# Altium PCB Vertap_PCB.PcbDoc
Units mm, origin at the board's own origin, x right, y up, seen from the top; angles counter-clockwise.
Board outline 64 x 27.5 mm, 2 copper layers (Top Layer, Bottom Layer), stack 1.671 mm thick; 38 components, 23 nets, 191 pads, 156 vias.
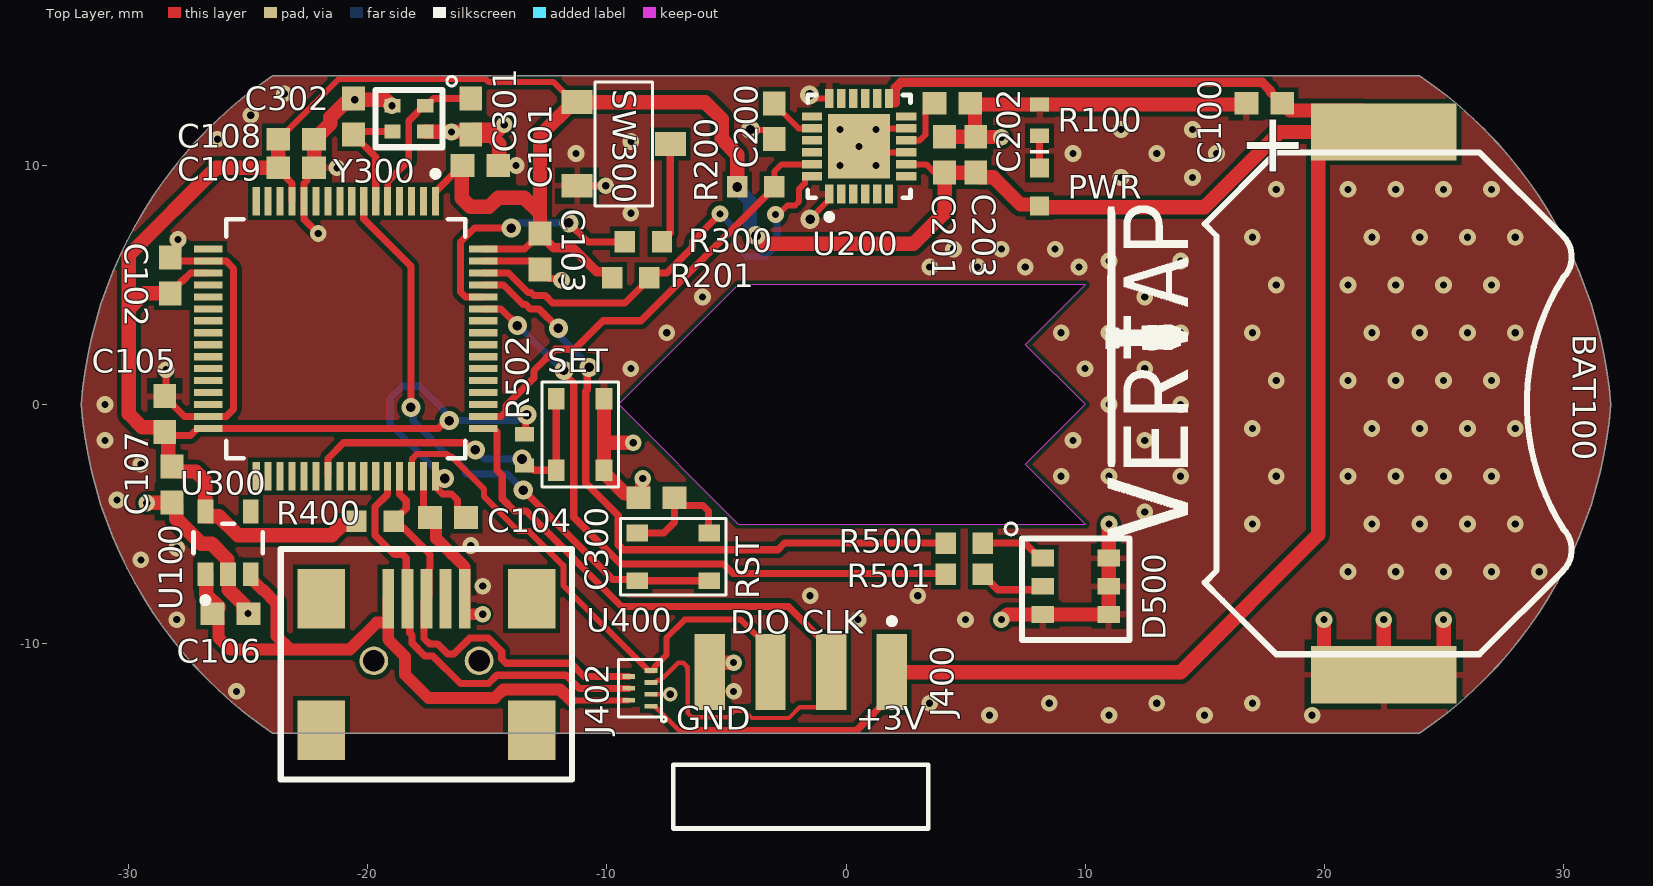
[diagram p0: Top Layer view]
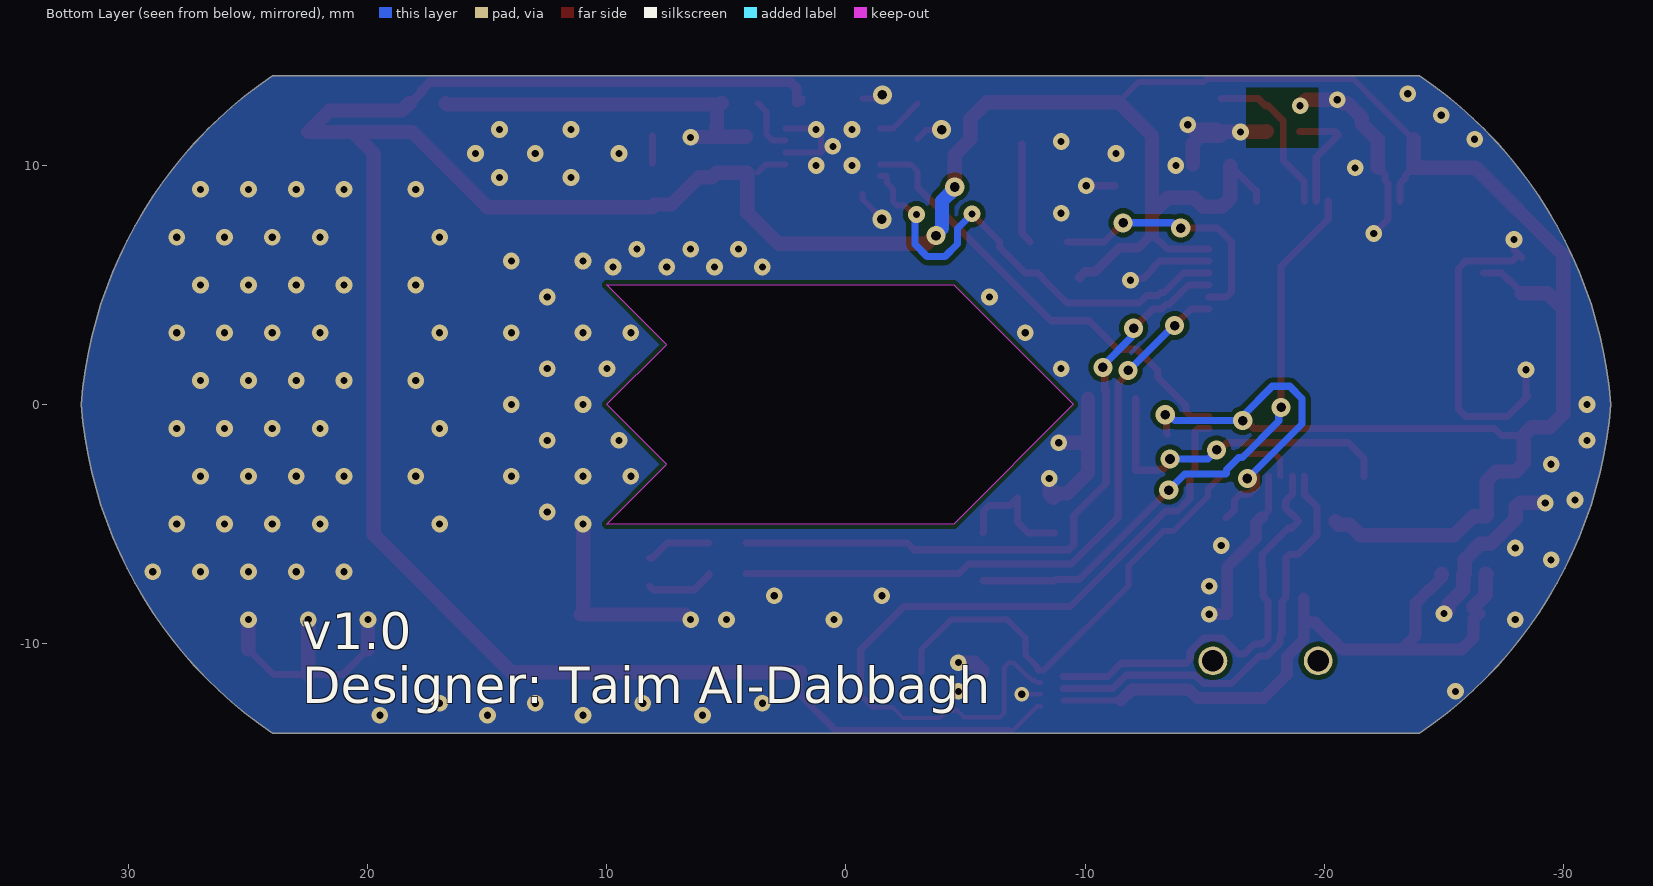
[diagram p1: Bottom Layer view, seen from below]
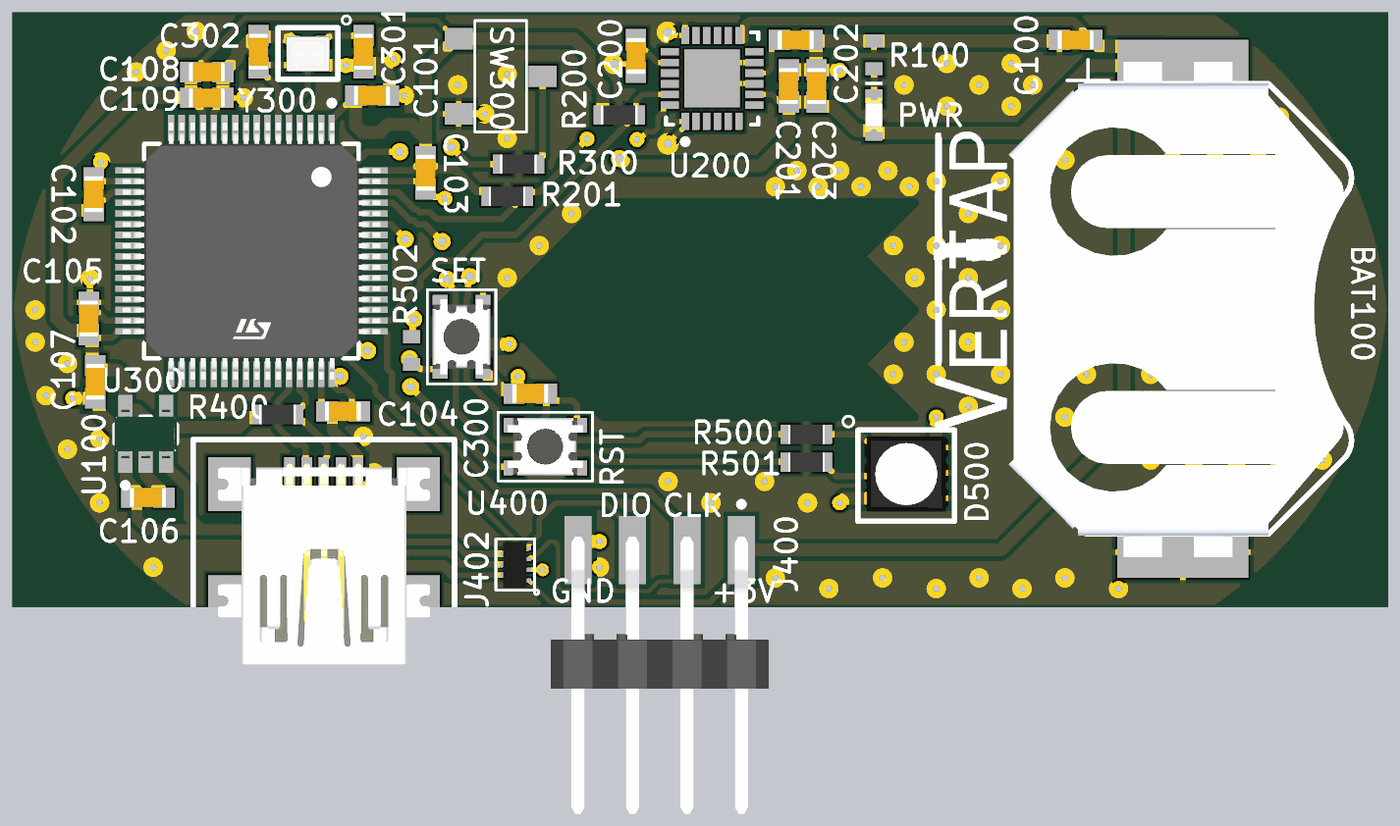
[diagram p2: 3D render of the assembled board from above, using the file's embedded part models]

## Layer stack, top to bottom
Top Solder: solder mask 0.0102, Solder Resist, Dk 3.5
Top Layer: signal copper 0.0356
Dielectric 1: dielectric 1.6, FR-4, Dk 4.6
Bottom Layer: signal copper 0.0356
Bottom Solder: solder mask 0.0102, Solder Resist, Dk 3.5

## Board outline
-24,-13.75 cw(c-13.714,1.437) -32,0 cw(c-13.714,-1.437) -24,13.75 24,13.75 cw(c13.714,-1.437) 32,0 cw(c13.714,1.437) 24,-13.75
cut-out: -4.5,5 -9.5,0 -4.5,-5 10,-5 7.5,-2.5 10,0 7.5,2.5 10,5

## Design rules (kind name [scope] priority, off if disabled: settings)
Clearance [All] p1: gap=0.2 ignorepadtopadclearanceinfootprint=FALSE except(0.127: SMDPad-SMDPad; 0.26: Via-Via; 0.33: Arc-Via Track-Via SMDPad-Via THPad-Via; 0.4: SMDPad-THPad; 0.5: THPad-THPad)
DiffPairsRouting [All] p1: maxlimit=0.254 minlimit=0.2 mostfreqgap=0.2 toplayer_minwidth=0.3 toplayer_maxwidth=0.3 toplayer_prefwidth=0.3 bottomlayer_minwidth=0.3 bottomlayer_maxwidth=0.3 bottomlayer_prefwidth=0.3 maxuncoupledlength=12.7
HoleSize [All] p1: absolutevalues=TRUE maxlimit=6.3 minlimit=0.2 maxpercent=80.000 minpercent=20.000
PolygonConnect [All] p1: thpad.connectstyle=Relief thpad.reliefconductorwidth=0.254 thpad.reliefentries=4 thpad.polygonreliefangle="90 Angle" thpad.airgapwidth=0.254 smdpad.connectstyle=Relief smdpad.reliefconductorwidth=0.254 smdpad.reliefentries=4 smdpad.polygonreliefangle="90 Angle" smdpad.airgapwidth=0.254 via.connectstyle=Direct via.reliefconductorwidth=0.254 via.reliefentries=4 via.polygonreliefangle="90 Angle" via.airgapwidth=0.254
RoutingVias [All] p1: holewidth=0.4 width=0.8 viastyle="Through Hole" minholewidth=0.3 minwidth=0.6 maxholewidth=0.4 maxwidth=0.8
SolderMaskExpansion [All] p1: expansion=0.102 istentingtop=FALSE
UnRoutedNet [All] p1: checkbadconnections=TRUE
Width [All] p1: maxlimit=1 minlimit=0.15 preferedwidth=0.3
27 further rules are at their usual default settings.

## Classes and differential pairs
differential pair class USB: MCU_USB
differential pair MCU_USB: +MCU_USB_P -MCU_USB_N

## Components (designator, comment, footprint, x,y, rotation, side; value= is the part's Value field where it differs from the comment)
BAT100 "+3V" BH-67D-5 22.5,0.05 r90 top
C100 "10u" CAP_0603_MURATA 17.5,12.6 r180 top
C101 "4u7" CAP_0603_MURATA -15.3,10 r0 top
C102 "100n" CAP_0603_MURATA -28.275,5.4 r90 top
C103 "100n" CAP_0603_MURATA -12.8,6.4 r270 top
C104 "100n" CAP_0603_MURATA -16.65,-4.725 r180 top
C105 "100n" CAP_0603_MURATA -28.5,-0.4 r90 top
C106 "1u" CAP_0603_MURATA -25.75,-8.75 r0 top
C107 "1u" CAP_0603_MURATA -28.2,-3.35 r270 top
C108 "1u" CAP_0603_MURATA -23,11.1 r0 top
C109 "10n" CAP_0603_MURATA -23,9.9 r0 top
C200 "2n2" CAP_0603_MURATA -3,11.85 r270 top
C201 "10n" CAP_0603_MURATA 4.125,10.45 r90 top
C202 "100n" CAP_0603_MURATA 4.45,12.6 r0 top
C203 "100n" CAP_0603_MURATA 5.425,10.45 r90 top
C300 "100n" CAP_0603_MURATA -7.925,-3.9 r180 top
C301 "16p" CAP_0603_MURATA -15.7,12.05 r270 top
C302 "16p" CAP_0603_MURATA -20.6,12.05 r90 top
D500 "RGB LED" ASMB-TTF0-0A20B 9.605,-7.605 r0 top
J400 "GEC04SBSN-M89" FP-GEC04SBSN-M89-MFG -1.89,-16.405 r180 top
J402 "USB_B_MICRO" MUSB-B5-S-RA-SMT-PP-T/R -17.55,-11.125 r0 top
PWR "150060VS75000" WL-SMCW_0603_150060xx75000 8.1,9.1 r270 top (schematic designator D100)
R100 "1k" RESC1608X55X25LL10T15 8.1,11.9 r270 top
R200 "2k2" RES_0603_YAGEO -3.775,9.1 r0 top
R201 "2k2" RES_0603_YAGEO -9,5.3 r0 top
R300 "10k" RES_0603_YAGEO -8.475,6.8 r180 top
R400 "1k5" RES_0603_YAGEO -19.7,-4.875 r0 top
R500 "1k" RES_0603_YAGEO 4.95,-5.8 r0 top
R501 "1k" RES_0603_YAGEO 4.95,-7.1 r0 top
R502 "1k" RESC1608X55X25LL10T15 -13.45,-1.9 r90 top
RST "LS38G2F-T" LS38G2F-T -7.225,-6.375 r180 top (schematic designator SW301)
SET "LS38G2F-T" LS38G2F-T -11.125,-1.25 r270 top (schematic designator SW500)
SW300 "CJS-1200TB1" CJS-1200TB1 -9.3,10.9 r270 top
U100 "MIC5365-3.0YD5-TR" FP-TSOT-5LD-PL-1-MFG -25.85,-5.785 r90 top
U200 "MPU-6050" IS-QFN-24_V 0.55,10.8 r90 top
U300 "STM32F303RET6" FP-LQFP64-5W-MFG -20.925,2.75 r270 top
U400 "PUSB3FR6Z" PUSB3FR6Z -8.625,-11.875 r180 top
Y300 "32MHz Crystal" CX2016SA32000H0FLJG1 -18.287,11.963 r180 top

## Footprints (in the part's own frame and the unit in brackets; to place one, negate y for a bottom-side part, rotate by r counter-clockwise, add the part's x,y. Pads: shape width x height; smd on the part's side, far side on the other; paste and mask are expansions set on the pad)
ASMB-TTF0-0A20B [mm]
  rect 0.94x0.7 smd: 1(-1.38,1.18) 2(1.38,1.18) 3(-1.38,0) 4(1.38,0) 5(-1.38,-1.18) 6(1.38,-1.18)
  silkscreen extent -2.95,-2.25 2.25,2.65, body extent -1.85,-1.81 1.85,1.7, height 2.8
BH-67D-5 [mm]
  rect 2.4x6.1 smd: 1(-11.35,0) 2(11.35,0)
  silkscreen extent -10.5,-7.86 10.5,7.5, body extent -11.58,-7.49 11.53,8.13, height 3.05
CAP_0603_MURATA [mm] "Chip Capacitor, 2-Leads, Body 1.60x0.80mm, IPC Medium Density"
  rect 1x0.95 smd: 1(-0.75,0) 2(0.75,0)
  body extent -0.85,-0.45 0.85,0.45, height 0.9
CJS-1200TB1 [mm]
  rect 1x1.3 smd: 1(-1.75,-1.95) 2(0,1.95) 3(1.75,-1.95)
  silkscreen extent -2.6,-1.2 2.6,1.2, body extent -2.69,-2.31 2.71,1.89, height 2.51
CX2016SA32000H0FLJG1 [mm]
  rect 0.675x0.575 smd: 1(-0.687,-0.537) 2(0.687,-0.537) 3(0.687,0.537) 4(-0.687,0.537)
  silkscreen extent -1.99,-1.76 1.4,1.2, body extent -1.02,-0.81 1.02,0.84, height 0.45
FP-GEC04SBSN-M89-MFG [mm]
  rect 1.27x3.18 smd paste+0 mask+0: 1(-3.81,-5.205) 2(-1.27,-5.205) 3(1.27,-5.205) 4(3.81,-5.205)
  silkscreen extent -5.34,-7.46 5.34,1.34, body extent -5.44,-6.9 5.44,7.47, height 0.25
FP-LQFP64-5W-MFG [mm]
  rect 1.2x0.3 smd paste+0 mask+0: 1(-5.75,3.75) 2(-5.75,3.25) 3(-5.75,2.75) 4(-5.75,2.25) 5(-5.75,1.75) 6(-5.75,1.25) 7(-5.75,0.75) 8(-5.75,0.25) 9(-5.75,-0.25) 10(-5.75,-0.75) 11(-5.75,-1.25) 12(-5.75,-1.75) 13(-5.75,-2.25) 14(-5.75,-2.75) 15(-5.75,-3.25) 16(-5.75,-3.75) 33(5.75,-3.75) 34(5.75,-3.25) 35(5.75,-2.75) 36(5.75,-2.25) 37(5.75,-1.75) 38(5.75,-1.25) 39(5.75,-0.75) 40(5.75,-0.25) 41(5.75,0.25) 42(5.75,0.75) 43(5.75,1.25) 44(5.75,1.75) 45(5.75,2.25) 46(5.75,2.75) 47(5.75,3.25) 48(5.75,3.75)
  rect 0.3x1.2 smd paste+0 mask+0: 17(-3.75,-5.75) 18(-3.25,-5.75) 19(-2.75,-5.75) 20(-2.25,-5.75) 21(-1.75,-5.75) 22(-1.25,-5.75) 23(-0.75,-5.75) 24(-0.25,-5.75) 25(0.25,-5.75) 26(0.75,-5.75) 27(1.25,-5.75) 28(1.75,-5.75) 29(2.25,-5.75) 30(2.75,-5.75) 31(3.25,-5.75) 32(3.75,-5.75) 49(3.75,5.75) 50(3.25,5.75) 51(2.75,5.75) 52(2.25,5.75) 53(1.75,5.75) 54(1.25,5.75) 55(0.75,5.75) 56(0.25,5.75) 57(-0.25,5.75) 58(-0.75,5.75) 59(-1.25,5.75) 60(-1.75,5.75) 61(-2.25,5.75) 62(-2.75,5.75) 63(-3.25,5.75) 64(-3.75,5.75)
  silkscreen extent -7.02,-5 5,5, body extent -6.45,-6.45 6.45,6.45, height 0.25
FP-TSOT-5LD-PL-1-MFG [mm]
  rect 1x0.66 smd paste+0 mask+0: 1(-1.315,0.95) 2(-1.315,0) 3(-1.315,-0.95) 4(1.315,-0.95) 5(1.315,0.95)
  silkscreen extent -2.52,-1.45 0.8,1.45, body extent -1.91,-1.55 1.91,1.55, height 0.25
IS-QFN-24_V [mm] "QFN, 24-Leads, Body 4x4mm, Pitch 0.5mm, Thermal Pad 2.7x2.6mm"
  rect 0.8x0.35 smd: 1(-2,1.25) 2(-2,0.75) 3(-2,0.25) 4(-2,-0.25) 5(-2,-0.75) 6(-2,-1.25) 13(2,-1.25) 14(2,-0.75) 15(2,-0.25) 16(2,0.25) 17(2,0.75) 18(2,1.25)
  rect 0.35x0.85 smd mask+0.102: 7(-1.25,-1.975) 8(-0.75,-1.975) 9(-0.25,-1.975) 10(0.25,-1.975) 11(0.75,-1.975) 12(1.25,-1.975) 19(1.25,1.975) 20(0.75,1.975) 21(0.25,1.975) 22(-0.25,1.975) 23(-0.75,1.975) 24(-1.25,1.975)
  rect 2.7x2.6 smd: 25(0,0)
  silkscreen extent -3.07,-2.15 2.15,2.15, body extent -2,-2 2,2, height 0.95
LS38G2F-T [mm]
  rect 0.9x0.7 smd: 1(-1.5,-1) 1(1.5,-1) 2(-1.5,1) 2(1.5,1)
  silkscreen extent -2.2,-1.6 2.2,1.6, body extent -1.75,-1.35 1.75,1.35, height 1.6
MUSB-B5-S-RA-SMT-PP-T/R [mm]
  rect 0.5x2.5 smd: 1(-1.6,3) 2(-0.8,3) 3(0,3) 4(0.8,3) 5(1.6,3)
  rect 2x2.5 smd: 4(-4.4,-2.5) 4(-4.4,3) 4(4.4,-2.5) 4(4.4,3)
  round 1.2 hole 0.9: 4(-2.2,0.4) 4(2.2,0.4)
  silkscreen extent -6.1,-4.57 6.1,5.08, body extent -4.94,-5.43 4.96,3.97, height 4.06
PUSB3FR6Z [mm]
  rect 0.53x0.2 smd: 1(-0.467,0.75) 2(-0.467,0.25) 3(-0.467,-0.25) 4(-0.467,-0.75) 5(0.467,-0.5) 6(0.467,0) 7(0.467,0.5)
  silkscreen extent -1.1,-1.2 0.9,1.4, body extent -0.53,-1.05 0.57,1.07, height 0.48
RES_0603_YAGEO [mm] "Chip Resistor, 2-Leads, Body 1.60x0.80mm, IPC Medium Density"
  rect 0.85x0.9 smd: 1(-0.775,0) 2(0.775,0)
  body extent -0.85,-0.45 0.85,0.45, height 0.55
RESC1608X55X25LL10T15 [mm] "Chip Resistor, 2-Leads, Body 1.60x0.80mm, IPC High Density"
  rect 0.6x0.8 smd: 1(-0.65,0) 2(0.65,0)
  body extent -0.85,-0.45 0.85,0.45, height 0.55
WL-SMCW_0603_150060xx75000 [mm] "SMD Mono-color Chip LED, body 1.6x0.8mm"
  rect 0.8x0.8 smd: 1(-0.8,0) 2(0.8,0)
  silkscreen extent -1.55,-0.4 -1.4,0.4, body extent -0.8,-0.4 0.8,0.4, height 0.7

## Part data
BAT100: library part BH-67D-5, "BATT RETAINER COIN 20MM 1CEL SMD", Supplier Part Number 1=2057-BH-67D-5-ND, Supplier 1=Digi-Key
C100: library part CAP_10uF_0603, "CAP CER 10UF 10V X7R 0603", Supplier Part Number 1=GRM188Z71A106KA73D, Supplier 1="Arrow Electronics"
C101: library part CAP_4.7uF_0603, "CAP CER 4.7UF 10V X7R 0603", Supplier 1=Digi-Key
C102 C103 C104 C105 C202 C203 C300: library part CAP_0.1uF_0603, "CAP CER 0.1UF 50V X7R 0603", Supplier Part Number 1=81-GCM188R71H104JA7D, Supplier 1=Mouser
C106 C107: library part CAP_1uF_0603, "CAP CER 1UF 16V X7R 0603", Supplier Part Number 1=GCM188R71C105KA64J, Supplier 1="Arrow Electronics"
C108: library part CAP_1uF_0603, "CAP CER 1UF 16V X7R 0603", Supplier 1="Arrow Electronics"
C109 C201: library part CAP_10nF_0603, "CAP CER 10000PF 100V X7R 0603", Supplier Part Number 1=GCM188R72A103KA37J, Supplier 1="Arrow Electronics"
C200: library part CAP_2.2nF_0603, "2200 pF ±20% 50V Ceramic Capacitor X7R 0603 (1608 Metric)", Supplier Part Number 1=81-GCD188R71H222MA1D, Supplier 1=Mouser
C301 C302: library part CAP_16pF_0603, "CAP CER 16PF 100V C0G/NP0 0603", Supplier 1="Arrow Electronics"
D500: library part ASMB-TTF0-0A20B, "Red, Green, Blue (RGB) 621nm Red, 522nm Green, 468nm Blue LED Indication - Discrete 2.1V Red, 2.9V Green, 2.9V Blue 4-SMD, J-Lead", Supplier Part Number 1=57AC0504, Supplier 1=Newark
J400: library part CMP-25680-000072-1, "CONN HEADER SMD R/A 4POS 2.54MM", Color=Black, Flammability Rating="UL94 V-0", Max Operating Temperature=150°C, Min Operating Temperature=-65°C, Package Quantity=1, Connector Type="Male Pin", Contact Finish - Mating=TIN, Contact Material=Bronze, Contact Mating Length=0.23inch, Contact Plating=Tin, Contact Shape=Square, Contact Type="Male Pin", Fastening Type=Pull, Gender=Male, Height=3.56mm, Housing Color=Black, Housing Material=Plastic, Insulation Color=Black, Insulation Material=Nylon, Lead Free="Lead Free", Length=10.2mm, Mount="Surface Mount", Number of Contacts=4, Number of Positions=4, Number of Rows=1, Packaging=Bulk, Pitch=0.1inch, RoHS Compliant=Yes, Series=-, Termination=Solder, Width=2.54mm
J402: library part MUSB-B5-S-RA-SMT-PP-T/R, "MINI USB, TYPE B, RIGHT ANGLE, S", Supplier 1="Arrow Electronics", Supplier Part Number 1=MUSB-B5-S-RA-SMT-PP-T/R
PWR: library part CMP-1426-00006-6, Case Code (Imperial)=0603, Case Code (Metric)=1608, Color=Green, Forward Current=100mA, Forward Voltage=2V, Max Junction Temperature (Tj)=95°C, Max Operating Temperature=85°C, Max Reverse Voltage (DC)=5V, Min Operating Temperature=-40°C, Power Dissipation=72mW, Test Current=20mA, Case/Package=0603, Dominant Wavelength=570nm, Height=700µm, Length=1.6mm, Lens Style="Clear, Rectangular", Luminous Intensity=40mcd, Mount="Surface Mount", NexarPartId=29717778, Number of Pins=2, Packaging="Tape and Reel", Peak Wavelength=572nm, REACH SVHC=Unknown, Reverse Voltage=5V, RoHS=Compliant, Viewing Angle=140°, Wavelength=570nm, Width=800µm
R100 R502: library part CMP-2000-04305-1, Manufacturer=Yageo, Part Number=RC0603JR-101KL
R200 R201: library part RES_0603_2.2K, "RES 2.2K OHM 5% 1/10W 0603", Manufacturer=YAGEO, Manufacturer Part Number=RC0603JR-072K2L, Supplier Part Number 1=9707183, Supplier 1="Future Electronics"
R300: library part RES_0603_10K, "RES 10K OHM 1% 1/10W 0603", Manufacturer=YAGEO, Manufacturer Part Number=AC0603FR-1310KL, Supplier 1="Arrow Electronics"
R400: library part RES_0603_1.5K, "RES 1.5K OHM 1% 1/10W 0603", Manufacturer=YAGEO, Manufacturer Part Number=RC0603FR-131K5L, Supplier Part Number 1=7064402, Supplier 1="Future Electronics"
R500 R501: library part RES_0603_1K, "RES 1K OHM 5% 1/10W 0603", Manufacturer=YAGEO, Manufacturer Part Number=RC0603JR-101KL, Supplier 1="Arrow Electronics", Supplier Part Number 1=RC0603JR-101KL
RST SET: "TOP-PRESS TACTILE SWITCH", Supplier Part Number 1=1642-LS38G2F-TCT-ND, Supplier 1=Digi-Key
SW300: "SWITCH SLIDE SPDT 100MA 6V", Supplier 1=Avnet, Supplier Part Number 1=CJS-1200TB1
U100: library part CMP-00252-66803206-1, "MIC5365-3.0YD5-TR LDO Regulator Pos 3V 0.15A 5-Pin TSOT-23 T/R", Case/Package=SOT-23-5, Dropout Voltage=155mV, Max Junction Temperature (Tj)=125°C, Max Supply Voltage=5.5V, Min Current Limit=200mA, Min Operating Temperature=-40°C, Min Supply Voltage=2.5V, Output Current=150mA, Output Voltage=3V, Accuracy=2%, Height=1mm, Lifecycle Status=Production, Max Operating Temperature=125°C, Mount="Surface Mount", NexarPartId=66803206, Number of Outputs=1, Number of Regulators=1, RoHS=Compliant
U200: library part CMP-010-00024-1, "Analog Circuit, 1 Func, CMOS", Case/Package=HVQCCN, Max Operating Temperature=85°C, Max Supply Voltage=3.46V, Min Operating Temperature=-40°C, Min Supply Voltage=2.375V, Nominal Supply Voltage=2.5V, Pins=24, RoHS Compliant=Yes
U300: library part CMP-0537-00048-2, "IC MCU 32BIT 512KB FLASH 64LQFP", Ambient Temperature Range High=+85°C, Ambient Temperature Range Low=-40°C, Frequency=72MHz, Manufacturer=STMicroelectronics, Max Junction Temp=+105°C, Max Supply Voltage=3.6V, Min Supply Voltage=2V, Nominal Supply Current=4.27-66.4mA, Package=LQFP64-5W, Temperature="-40°C to +105°C", Automotive=No, Category=IC, ComponentLink2Description=Datasheet, ComponentLink2URL=https://www.st.com/resource/en/datasheet/stm32f303re.pdf, Core Architecture="ARM Cortex-M4", Data Bus Width=32bits, Device Class L1="Integrated Circuits (ICs)", Device Class L2="Embedded Processors and Controllers", Device Class L3=Microcontrollers, Digikey Description="IC MCU 32BIT 512KB FLASH 64LQFP", Height=1.6mm, Interface=I2C,SPI,UART,USART,CAN,USB,LIN,IrDA,I2S, Lead Free=Yes, Manufacturer Part Number=STM32F303RET6, Memory Size=512KBytes, Memory Type=FLASH, Mouser Description="MCU 32-Bit STM32 ARM Cortex M4 RISC 512KB Flash 2.5V/3.3V 64-Pin LQFP Tray", Number Of A/D Converters=4, Number Of Adc Channels=22, Number Of Cores=1, Number Of I2C Channels=3, Number Of I/Os=26, Number Of Pwm Channels=31, Number Of Spi Channels=4, Number Of Timers/Counters=6, Number Of Uart Channels=2, Number Of Usb Channels=1, Octopart=https://octopart.com/stm32f303ret6-stmicroelectronics-53115257, Ram Size=80KBytes, RoHS=TRUE, Standoff Height=0.05mm, Temperature Range High=+105°C, Temperature Range Low=-40°C
U400: "TVS DIODE 3.3VWM 3VC 7XSON", Supplier 1="Arrow Electronics", Supplier Part Number 1=PUSB3FR6Z
Y300: library part CX2016SA32000H0FLJG1, "32 MHz ±10ppm Crystal 12pF 60 Ohms 4-SMD, No Lead", Supplier Part Number 1=478-CX2016SA32000H0FLJG1CT-ND, Supplier 1=Digi-Key

## Via types
v1: diameter 0.7, hole 0.3, Top Layer to Bottom Layer, 137 vias
v2: diameter 0.8, hole 0.4, Top Layer to Bottom Layer, 18 vias
v3: diameter 0.6, hole 0.3, Top Layer to Bottom Layer, 1 vias

## Nets (pads, with @x,y where several pads share a name; then routed paths per layer and width w, separated by ;. In a path a pad name is that pad's centre, name@x,y a point inside that pad or via, vN(x,y) a via of type N, cw(c..) or ccw(c..) an arc to the next point about the centre after c; other vN are vias at no path point)
+3V: BAT100.2 C100.1 C101.1 C102.1 C103.1 C104.1 C105.1 C107.1 C108.1 C109.1 C201.1 C203.1 J400.1 PWR.2 R200.1 R201.1 R400.1 R502.2 SW300.1 U100.5 U200.8 U200.13 U300.1 U300.13 U300.19 U300.32 U300.48 U300.64 U400.1 | length 210.5
  Top Layer w0.2: U400.1 -7.993,-12.625 -6.993,-13.625 -6.825,-13.625
  Top Layer w0.25: C108.1 -23.725,11.1 -22.292,12.533 -22.292,12.542 -21.21,13.625 -15.09,13.625 -14.965,13.5 -12.25,13.5 SW300.1@-11.4,12.65 ; -6.825,-13.625 0.45,-13.625 ; U200.13 1.85,12.75 1.85,12.625 2.064,12.625 ; U200.8 3.35,10.05 C201.1@3.7,9.7
  Top Layer w0.3: C105.1@-28.35,-1.3 -27.425,-1.3 -27.125,-1 U300.32 -17.06,-1 -16.735,-0.675 v2(-16.6,-0.675) ; C102.1@-28.1,4.85 -27.775,5.175 -27.75,5.175 -27.425,5.5 U300.19 ; C109.1 -23.725,9.9 -23.4,9.575 -23.4,9.47 -23.175,9.245 U300.13 ; U300.48 U300.48@-17.175,-3.096 ; U300.1 -17.175,8.95 -17.125,8.95 C101.1@-16.075,10 ; v2(-16.795,-3.096) U300.48@-17.175,-3.096 ; C104.1 -15.925,-4.725 -16.25,-4.4 -16.25,-4 -16.5,-3.75 -16.875,-3.75 -17.175,-3.45 U300.48@-17.175,-3.096 ; U300.64 -13.45,6.5 -13.15,6.8 -13.125,6.8 C103.1@-12.8,7.125 ; R502.2 -13.403,-1.203 -13.403,-0.475 v2(-13.355,-0.428) ; 0.45,-13.625 1.92,-12.155 J400.1
  Top Layer w0.4: C103.1 -12.8,7.125 -12.225,6.55 -11.425,6.55 -10.425,5.55 -10,5.55 -9.775,5.325 R201.1 ; 2.064,12.625 2.064,13.241 2.299,13.475 17.416,13.475 17.75,13.141 17.75,13.075 18.225,12.6 C100.1
  Top Layer w0.6: C102.1 -29.35,4.65 -30,4 ; C108.1 C109.1 -26.35,9.9 -30,6.25 -30,4 ; R400.1 -20.475,-4.9 -20.6,-5.025 -21.075,-5.025 -21.52,-5.47 -25.437,-5.47 -26.237,-4.67 -26.77,-4.67 -26.8,-4.64 U100.5 -26.8,-3.2 -27.2,-2.8 -28.025,-2.8 -28.2,-2.625 C107.1 -28.35,-2.45 -28.35,-1.3 C105.1 -28.5,-1.125 -28.675,-0.95 -29.449,-0.95 -30,-0.399 -30,4 ; C101.1@-16.075,10 -16.075,8.625 -15.724,8.274 -14.933,8.274 -14.552,8.655 -13.455,8.655 -12.8,8 ; C103.1 -12.8,8 ; v2(-4.55,9.1) -4.55,10.45 -5.191,11.091 -5.191,11.941 -5.9,12.65 SW300.1 -11.4,12.65 -12.8,11.25 -12.8,8 ; v2(-3.765,7.065) -3.711,7.065 -3.366,6.72 2.82,6.72 4.125,8.025 C201.1 C203.1 5.425,9.675 5.6,9.5 6.167,9.5 7.297,8.37 8.03,8.37 PWR.2 8.1,8.25 15,8.25 18.15,11.4 BAT100.2@20.65,11.4 ; J400.1 14,-11.2 19.75,-5.45 19.75,10.5 BAT100.2@20.65,11.4 ; C100.1 18.275,12.6 18.575,12.3 21.6,12.3 BAT100.2 BAT100.2@20.65,11.4
  Bottom Layer w0.3: v2(-16.795,-3.096) -19.08,-0.811 -19.08,0.245 -18.565,0.76 -17.835,0.76 -16.6,-0.475 v2(-16.6,-0.675) -13.738,-0.675 -13.49,-0.428 v2(-13.355,-0.428)
  Bottom Layer w0.6: v2(-4.55,9.1) -4.55,9.046 -4.014,8.51 -4.014,7.368 -3.765,7.119 v2(-3.765,7.065)
BOOT0: R300.2 U300.60 | length 10.8
  Top Layer w0.3: U300.60 -15.92,4.5 -16.125,4.705 -16.125,6.795 -15.54,7.38 v2(-14.005,7.38) v2@-14.101,7.476 ; v2(-11.595,7.6) -10.795,6.8 R300.2
  Bottom Layer w0.3: v2(-14.005,7.38) -13.87,7.38 -13.65,7.6 v2(-11.595,7.6)
BUTTON_INT: R502.1 SET.1 U300.39 | length 14.1
  Top Layer w0.3: U300.39 -21.675,-2.255 -21.02,-1.6 -15.937,-1.6 -15.639,-1.898 v2(-15.503,-1.898) ; v2(-13.555,-2.28) -13.555,-2.415 -13.3,-2.671 -13.3,-2.7 -13.1,-2.7 -13.05,-2.75 -12.125,-2.75 SET.1@-12.125,0.25
  Bottom Layer w0.3: v2(-15.503,-1.898) -15.503,-1.916 -15.14,-2.28 v2(-13.555,-2.28)
GND: BAT100.1 C100.2 C101.2 C102.2 C103.2 C104.2 C105.2 C106.2 C107.2 C108.2 C109.2 C200.2 C201.2 C202.2 C203.2 C300.2 C301.2 C302.2 D500.2 D500.4 D500.5 D500.6 J400.4 J402.5 R100.1 SET.2 SW300.3 U100.2 U200.1 U200.9 U200.11 U200.18 U200.25 U300.12 U300.18 U300.31 U300.47 U300.63 U400.2 Y300.2 Y300.4 | length 99.3
  Top Layer w0.2: U400.2 v3(-7.35,-12.125)
  Top Layer w0.25: v2(-4,11.5) -3.975,11.475 -3.35,11.475 -3,11.125 C200.2 ; v2(-1.525,12.955) -1.376,12.955 -1.221,12.8 U200.18 ; v2(-1.5,7.75) -1.5,7.775 -0.7,8.575 U200.1 ; v1(0.55,10.8) 0.8,10.8 U200.25@1.05,10.55 ; U200.9 U200.25@1.05,10.55 ; U200.11 1.3,11.55 1.05,11.3 U200.25@1.05,10.55
  Top Layer w0.3: v1(-28.45,1.45) -28.45,0.4 C105.2 -28.5,0.325 -27.675,-0.5 U300.31 -25.93,-0.5 -25.625,-0.195 -25.625,5.695 -25.93,6 -26.225,6 U300.18 -27.875,6 C102.2@-28.075,6.2 ; C102.2 -27.95,6.475 v1(-27.95,6.9) ; C109.2@-22.275,9.9 -22.547,9.628 -22.547,9.372 -22.675,9.245 U300.12 -22.675,7.75 v1(-22.075,7.15) ; U300.47 -17.675,-4.45 C104.2 ; U300.63 -13.125,6 -12.8,5.675 C103.2 -12.8,5.625 -12.475,5.3 -12.45,5.3 -12.427,5.277 -11.977,5.277 v1(-11.9,5.2) ; C101.2@-14.525,10.05 C101.2@-14.5,10.05 ; SW300.3 v1(-10.05,9.15) ; BAT100.1@20,-10.25 21.05,-11.3 BAT100.1 23.95,-11.3 BAT100.1@25,-10.25
  Top Layer w0.5: C104.2 -17.375,-4.725 -17.15,-4.95 -17.15,-5.6 -16.5,-6.25 -16.489,-6.25 -15.95,-6.789 J402.5 -15.95,-8.775 v1(-15.2,-8.775)
  Top Layer w0.6: v1(-29.25,-4.125) -29.237,-4.112 -28.212,-4.112 C107.2 -28.025,-4.275 -28.025,-4.782 -26.977,-5.83 -26.533,-5.83 -25.88,-6.483 -25.88,-7.07 U100.2 -25.82,-7.13 -25.82,-7.748 -25.4,-8.168 -25.2,-8.368 -25.2,-8.575 -25.025,-8.75 C106.2 ; C109.2@-22.275,9.9 -22.25,9.925 C108.2 -22.225,11.1 -21.575,11.75 -21.575,12.007 -20.982,12.6 -20.775,12.6 -20.6,12.775 C302.2 v1(-20.55,12.75) -19.25,12.75 v1(-18.999,12.5) Y300.2 ; Y300.4 -17.588,11.413 -15.813,11.413 C301.2 ; C101.2@-14.5,10.05 -14.5,10.899 -14.851,11.25 -15.65,11.25 C301.2 ; v1(-14.3,11.7) -14.327,11.7 -14.527,11.5 -15.525,11.5 -15.7,11.325 C301.2 ; SET.2@-10.125,0.25 -10.125,-1.6 ; v1(-8.9,-1.6) -10.125,-1.6 ; v1(-8.5,-3.1) -8.519,-3.119 -8.519,-3.744 C300.2 -8.85,-3.725 -9.25,-3.725 -10.125,-2.85 -10.125,-2.75 -10.125,-1.6 ; J400.4 -5.7,-11.135 -5.365,-10.8 v1(-4.7,-10.8) ; C201.2@4.2,11.225 4.2,11.2 C203.2 ; C202.2 5.25,12.55 16.7,12.55 C100.2 ; C202.2@5.225,12.6 5.4,12.425 5.4,11.61 5.425,11.585 C203.2 ; v1(6.5,-9) 6.527,-9 6.742,-8.785 D500.5 D500.6 ; v1(6.5,11.175) 6.488,11.187 5.438,11.187 C203.2 ; v1(11,-5) 10.993,-5.008 10.993,-6.418 D500.2 D500.4 D500.6 ; D500.6@11.105,-8.785 D500.6 ; BAT100.1@20,-10.25 v1(20,-9) ; BAT100.1 v1(22.5,-9) ; BAT100.1@25,-10.25 v1(25,-9)
  other v1: 6,-13 11,-13 15,-13 19.5,-13 3.5,-12.5 8.5,-12.5 13,-12.5 17,-12.5 -25.5,-12 -4.7,-12 -28,-9 0.5,-9 5,-9 -25.013,-8.75 -1.5,-8 3,-8 -15.2,-7.6 21,-7 23,-7 25,-7 27,-7 29,-7 -29.5,-6.5 -28,-6 -15.7,-5.9 17,-5 22,-5 24,-5 26,-5 28,-5 12.5,-4.5 -30.5,-4 9,-3 11,-3 14,-3 18,-3 21,-3 23,-3 25,-3 27,-3 -29.5,-2.5 -31,-1.5 9.5,-1.5 12.5,-1.5 17,-1 22,-1 24,-1 26,-1 28,-1 -31,0 11,0 14,0 18,1 21,1 23,1 25,1 27,1 -9,1.5 10,1.5 12.5,1.5 -7.5,3 9,3 11,3 14,3 17,3 22,3 24,3 26,3 28,3 -6,4.5 12.5,4.5 18,5 21,5 23,5 25,5 27,5 3.5,5.75 5.5,5.75 7.5,5.75 9.75,5.75 11,6 14,6 4.5,6.5 6.5,6.5 8.75,6.5 17,7 22,7 24,7 26,7 28,7 -9,8 18,9 21,9 23,9 25,9 27,9 11.5,9.5 14.5,9.5 -21.3,9.9 -13.8,10 -0.25,10 1.25,10 -11.3,10.5 9.5,10.5 13,10.5 15.5,10.5 -9,11 -26.3,11.1 -16.5,11.4 -0.25,11.5 1.25,11.5 11.5,11.5 14.5,11.5 -24.9,12.1 -23.5,13
I2C_SCL: R200.2 U200.23 U300.50 | length 18.8
  Top Layer w0.25: R200.2 -3,9.75 -2.7,10.05 U200.23
  Top Layer w0.3: U300.50 -14.43,-0.5 -14.225,-0.295 -14.225,-0.053 -13.05,1.122 -13.05,1.425 -12.165,2.31 -11.36,2.31 -10.17,3.5 -8.575,3.5 -3,9.075 R200.2
I2C_SDA: R201.2 U200.24 U300.62 | length 19.8
  Top Layer w0.25: v1(-2.95,7.95) -2.828,7.95 -2.453,8.325 -2.134,8.325 -1.975,8.484 -1.975,9 -1.725,9.25 -1.725,9.5 -1.675,9.55 U200.24
  Top Layer w0.3: U300.62 -14.12,5.5 -13.3,4.68 -13.178,4.68 -13.053,4.555 -12.585,4.555 -12.28,4.25 -9.25,4.25 -8.225,5.275 R201.2 -8.025,5.5 -7.5,5.5 -6.426,6.574 -6.426,6.824 v1(-5.275,7.975)
  Bottom Layer w0.3: v1(-5.275,7.975) -4.664,7.364 -4.664,6.72 -4.13,6.185 -3.401,6.185 -2.885,6.701 -2.885,7.885 v1(-2.95,7.95)
IMU_CPOUT: C200.1 U200.20 | length 2
  Top Layer w0.25: C200.1 -2.65,12.25 -2.65,12.215 -1.985,11.55 U200.20
IMU_REGOUT: C202.1 U200.10 | length 2.4
  Top Layer w0.25: U200.10 3,11.05 3.085,11.05 3.325,11.29 3.325,12.25 3.675,12.6 C202.1
MCU_OSC_IN: C302.1 U300.6 Y300.3 | length 4.9
  Top Layer w0.3: U300.6 -19.675,10.35 -20.6,11.275 C302.1 -20.474,11.426 Y300.3
MCU_OSC_OUT: C301.1 U300.5 Y300.1 | length 6.7
  Top Layer w0.29: U300.5 -19.17,8.505 -19.17,9.33 -18.292,10.208 -18.292,11.858 -17.65,12.5 Y300.1
  Top Layer w0.3: Y300.1 -17.55,12.5 -17.25,12.8 C301.1
MCU_PWM_GREEN: R501.1 U300.59 | length 27.3
  Top Layer w0.3: U300.59 -14.43,4 -13.75,3.32 v2(-13.75,3.3) ; v2(-11.8,1.43) -11.8,1.295 -11.388,0.882 -11.388,-4.714 -9.427,-6.675 -5.13,-6.675 -4.73,-7.075 R501.1@4.175,-7.075
  Bottom Layer w0.3: v2(-13.75,3.3) -13.71,3.3 -11.84,1.43 v2(-11.8,1.43)
MCU_PWM_RED: R500.1 U300.61 | length 28
  Top Layer w0.3: U300.61 -14.327,5 -13.507,4.18 -13.385,4.18 -13.194,3.989 -12.831,3.989 v2(-12.032,3.19) ; v2(-10.747,1.554) -10.825,1.477 -10.825,0.617 -10.888,0.554 -10.888,-3.282 -9.525,-4.645 -9.525,-5.87 -9.32,-6.075 -2.847,-6.075 -2.572,-5.8 R500.1
  Bottom Layer w0.3: v2(-12.032,3.19) -11.937,3.094 -11.937,2.811 -10.747,1.622 v2(-10.747,1.554)
MCU_SWCLK: J400.2 U300.49 U400.3 | length 32.4
  Top Layer w0.18: -6.635,-11.142 -6.625,-11.152 -6.625,-12.91 -6.455,-13.08 -4.93,-13.08 -4.662,-12.811 -4.233,-12.811 -3.93,-13.115 -2.39,-13.115 -1.94,-12.665 J400.2@-1.13,-12.665
  Top Layer w0.2: U400.3@-8.162,-11.625 -7.993,-11.625 -7.918,-11.55 -7.807,-11.55 -7.782,-11.525 -7.769,-11.525 -7.639,-11.395 -7.603,-11.395 -7.014,-10.805 -6.806,-10.805 -6.635,-10.977 -6.635,-11.142
  Top Layer w0.25: J400.2@-1.13,-12.665 -0.62,-12.155 J400.2
  Top Layer w0.3: U300.49 -14.725,-1 -14.6,-1.125 -14.6,-2.75 -14.38,-2.97 -14.38,-3.945 -13.865,-4.46 -13.377,-4.46 -9.387,-8.45 -2.415,-8.45 -0.62,-10.245 J400.2
MCU_SWDIO: J400.3 U300.46 U400.4 | length 23.1
  Top Layer w0.25: U300.46 -18.15,-2.975 -18.15,-2.265 -17.96,-2.075 -16.689,-2.075 -16.594,-2.17 -16.512,-2.17 -15.141,-3.54 -15.141,-3.855 -13.699,-5.298 -13.268,-5.298 -11.825,-6.74 -11.825,-7.573 -8.273,-11.125 U400.4 -8.043,-11.125 -8.018,-11.1 -8.018,-10.985 -7.5,-10.467 -7.5,-9.75 -6.75,-9 -4.405,-9 -3.16,-10.245 J400.3
MCU_USB_N: J402.2 U300.44 U400.6 | length 18.2
  Top Layer w0.3: U300.44 -19.175,-3.755 -19.7,-4.28 -19.7,-5.47 -18.895,-6.275 -18.547,-6.275 -18.397,-6.425 -18.397,-8.078 J402.2 -18.25,-8.225 -18.25,-9.561 -18.15,-9.661 -18.15,-9.992 -17.624,-10.517 -17.29,-10.517 -16.132,-11.675 -14.956,-11.675 -14.606,-11.325 -11.715,-11.325 -11.165,-11.875 U400.6
MCU_USB_P: J402.3 R400.2 U300.45 U400.5 | length 17.9
  Top Layer w0.3: U300.45 -18.675,-3.755 -18.4,-4.03 -18.4,-4.35 -18.625,-4.575 -18.65,-4.575 -18.925,-4.85 R400.2 -18.925,-4.9 -18.65,-5.175 -18.496,-5.175 -17.896,-5.775 -17.4,-6.271 -17.4,-6.849 -17.45,-6.899 -17.45,-8.025 J402.3 -17.65,-8.225 -17.65,-9.536 -17.65,-9.784 -17.417,-10.017 -17.083,-10.017 -16.659,-10.441 -16.41,-10.441 -15.743,-9.775 -14.956,-9.775 -14.4,-10.331 -14.4,-10.649 -14.224,-10.825 -11.508,-10.825 -10.958,-11.375 U400.5
NetC300_1: C300.1 RST.1 | length 5.3
  Top Layer w0.3: RST.1@-8.725,-5.375 -7.625,-5.375 -7.175,-4.925 C300.1 -6.85,-4.225 -5.986,-4.225 -5.75,-4.461 -5.75,-5.35 RST.1@-5.725,-5.375
NetD100_1: PWR.1 R100.2 | length 1.2
  Top Layer w0.3: PWR.1@8.1,10.092 R100.2
NetD500_1: D500.1 R500.2 | length 2.8
  Top Layer w0.3: R500.2 7.48,-5.8 8.105,-6.425 D500.1
NetD500_3: D500.3 R501.2 | length 2.8
  Top Layer w0.3: R501.2 5.725,-7.125 6.35,-7.75 8.08,-7.75 D500.3
NetR300_1: R300.1 SW300.2 | length 4.2
  Top Layer w0.3: R300.1 -7.7,6.825 -7.35,7.175 SW300.2
NRST: RST.2 U300.7 | length 25.3
  Top Layer w0.3: U300.7 -20.175,7.755 -18.2,5.78 v2(-18.2,-0.12) ; v2(-13.5,-3.58) -9.76,-7.32 -8.78,-7.32 -8.725,-7.375 RST.2@-5.725,-7.375
  Bottom Layer w0.3: v2(-18.2,-0.12) -18.104,-0.216 -18.104,-0.695 -16.584,-2.216 -16.43,-2.216 -15.915,-2.731 -15.915,-2.885 -15.888,-2.912 -14.168,-2.912 v2(-13.5,-3.58)
USB_VCC: C106.1 J402.1 U100.1 U100.3 U400.7 | length 28
  Top Layer w0.25: -11.514,-12.375 U400.7
  Top Layer w0.5: C106.1 -26.475,-8.75 -26.25,-8.975 -26.25,-9.75 -25.75,-10.25 -23.255,-10.25 ; U100.3@-24.93,-7.07 -24.93,-7.24 -24.435,-7.735 -24.404,-7.735 -23.829,-8.309 -23.829,-9.676 -23.255,-10.25 ; J402.1 J402.1@-19.15,-9.125 ; -11.514,-12.375 -11.964,-11.925 -14.336,-11.925 -14.686,-12.275 -17.475,-12.275 -18.443,-11.307 -18.443,-10.547 -19.15,-9.84 J402.1@-19.15,-9.125 ; -23.255,-10.25 -20.76,-10.25 -19.635,-9.125 J402.1@-19.15,-9.125
  Top Layer w0.6: U100.1@-26.77,-7.07 U100.1 -26.77,-7.13 -26.77,-7.955 C106.1@-26.238,-8.487 ; U100.3@-24.93,-7.07 U100.3
pads on no net: J402.4 U100.4 U200.2 U200.3 U200.4 U200.5 U200.6 U200.7 U200.12 U200.14 U200.15 U200.16 U200.17 U200.19 U200.21 U200.22 U300.2 U300.3 U300.4 U300.8 U300.9 U300.10 U300.11 U300.14 U300.15 U300.16 U300.17 U300.20 U300.21 U300.22 U300.23 U300.24 U300.25 U300.26 U300.27 U300.28 U300.29 U300.30 U300.33 U300.34 U300.35 U300.36 U300.37 U300.38 U300.40 U300.41 U300.42 U300.43 U300.51 U300.52 U300.53 U300.54 U300.55 U300.56 U300.57 U300.58

## Polygon pours and split planes (outlines as drawn)
GND on Bottom Layer "GND_L02_P001" (solid, pour order 1): -24,-13.75 cw(c-13.714,1.437) -32,0 cw(c-13.714,-1.437) -24,13.75 24,13.75 cw(c13.714,-1.437) 32,0 cw(c13.714,1.437) 24,-13.75
GND on Top Layer "GND_L01_P003" (solid, pour order 3): -24,-13.75 cw(c-13.714,1.437) -32,0 cw(c-13.714,-1.437) -24,13.75 24,13.75 cw(c13.714,-1.437) 32,0 cw(c13.714,1.437) 24,-13.75

## Other copper
Multi-Layer:
  pour cut-out: -19.75,13.25 -16.75,13.25 -16.75,10.75 -19.75,10.75

## Silkscreen, mask and mechanical layers (free items; w line width, h text height)
Top Overlay:
  drawing of 6 lines, arcs and shapes, not listed
  text "+" at 16.403,9.73 h2.54
  text "DIO" at -4.847,-9.597 h1
  text "CLK" at -1.847,-9.597 h1
  text "GND" at -7.097,-13.597 h1
  text "+3V" at 0.403,-13.597 h1
Bottom Overlay:
  text "v1.0" at 22.746,-10.246 h1.52
  text "Designer: Taim Al-Dabbagh" at 22.746,-12.488 h1.52
Top Component Center:
  lines w0.254: -2,0 2,0 ; 0,-2 0,2
Board Shape:
  lines w0.125: -24,-13.75 cw(c-13.714,1.437) -32,0 cw(c-13.714,-1.437) -24,13.75 ; 24,-13.75 ccw(c13.714,1.437) 32,0 ccw(c13.714,-1.437) 24,13.75
  lines w0.254: -24,-13.75 24,-13.75 ; -24,13.75 24,13.75 ; -10.5,0 -5.5,5 9,5 6.5,2.5 9,0 6.5,-2.5 9,-5 -5.5,-5 -10.5,0